# Altium PCB Midi Stick.PcbDoc
Units mm, origin at the board's own origin, x right, y up, seen from the top; angles counter-clockwise.
Board outline 47.13 x 17.53 mm, 2 copper layers (Top Layer, Bottom Layer); 34 components, 23 nets, 118 pads, 51 vias.
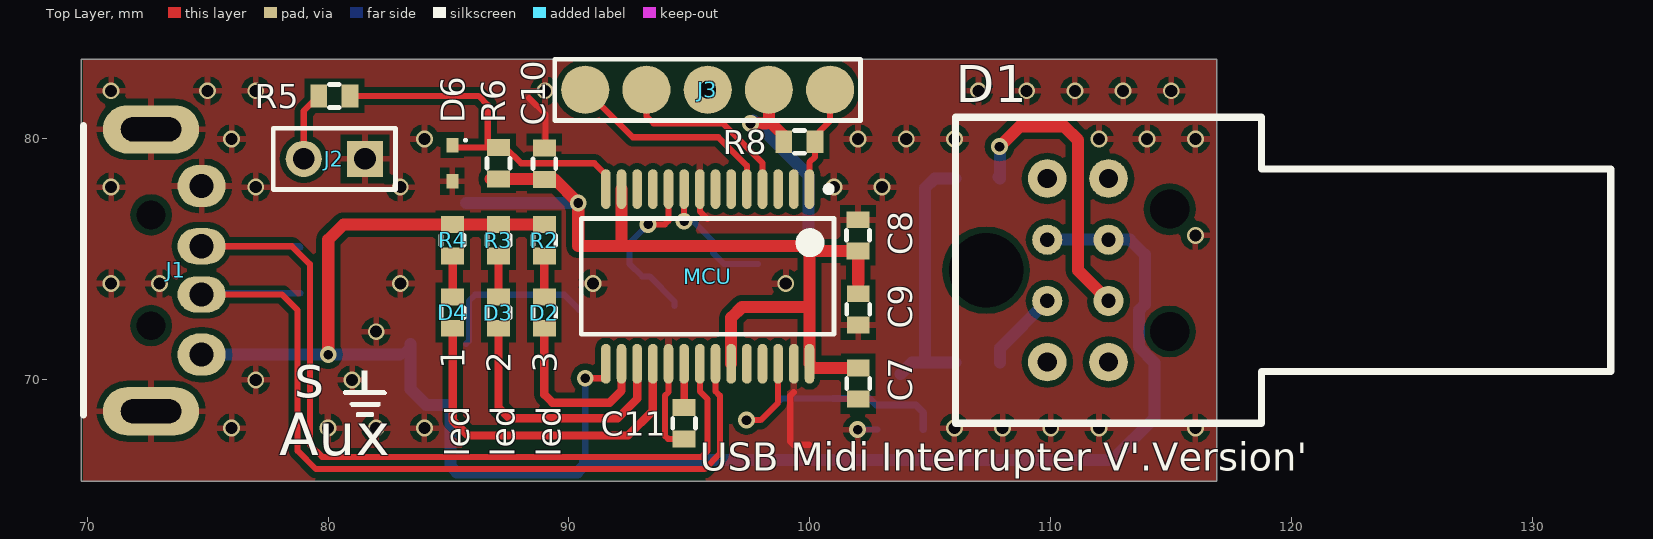
[diagram p0: Top Layer view]
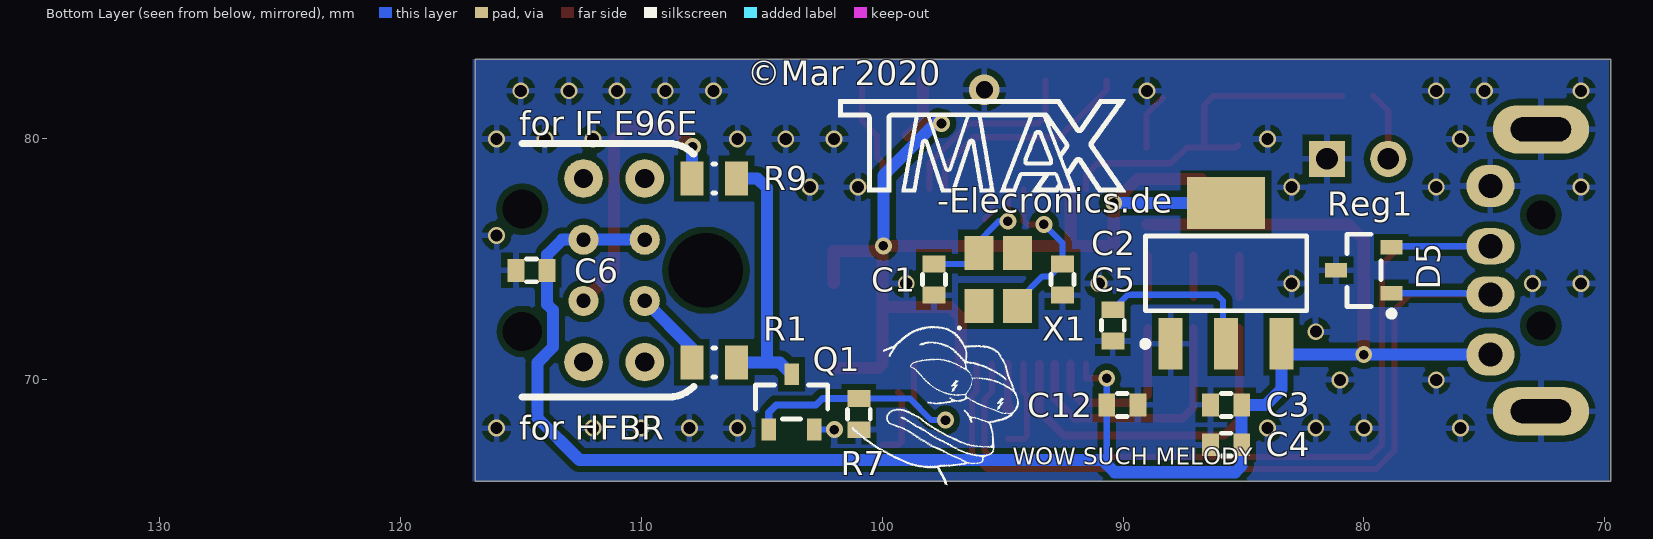
[diagram p1: Bottom Layer view, seen from below]
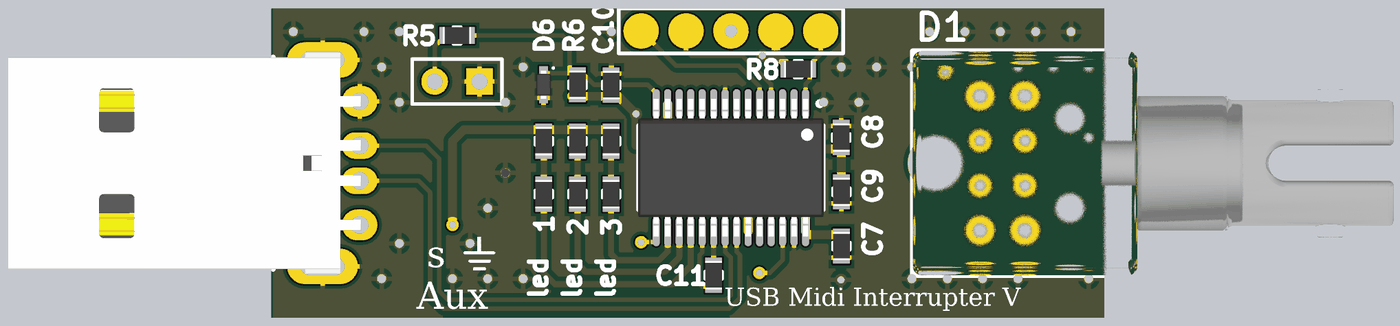
[diagram p2: 3D render of the assembled board from above, using the file's embedded part models]
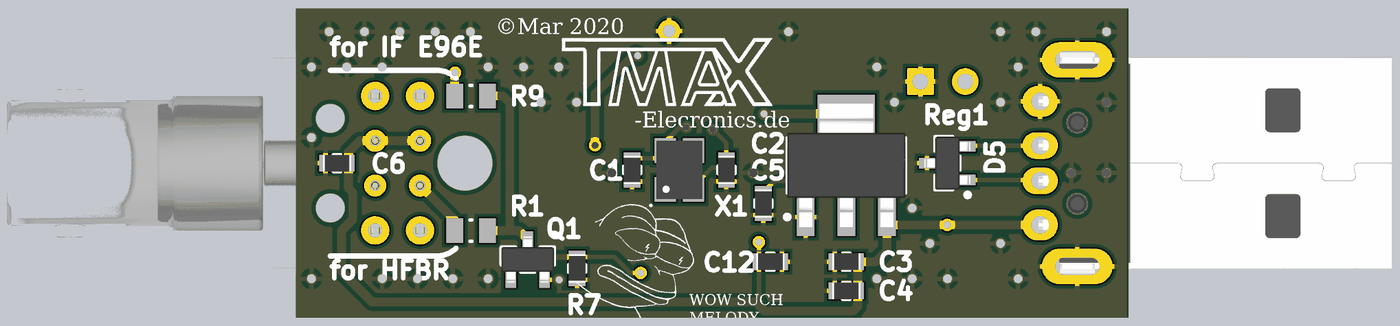
[diagram p3: 3D render of the assembled board from below, using the file's embedded part models]

## Layer stack, top to bottom
Top Solder: solder mask 0.0102, Solder Resist, Dk 3.5
Top Layer: signal copper 0.0356
Dielectric 1: dielectric 0.32, FR-4, Dk 4.8
Bottom Layer: signal copper 0.0356
Bottom Solder: solder mask 0.0102, Solder Resist, Dk 3.5

## Board outline
69.755,65.786 69.755,83.312 116.882,83.312 116.882,65.786

## Design rules (kind name [scope] priority, off if disabled: settings)
Clearance [All] p1: gap=0.127 ignorepadtopadclearanceinfootprint=FALSE except(0: Arc-Text Arc-Hole Track-Text Track-Hole SMDPad-Text SMDPad-Hole THPad-Text THPad-Hole Via-Text Via-Hole Fill-Text Fill-Hole Poly-Text Poly-Hole Region-Text Region-Hole Text-Text Text-Hole; 0.254: Arc-Fill Arc-Poly Arc-Region Track-Fill Track-Poly Track-Region SMDPad-Fill SMDPad-Poly SMDPad-Region THPad-Fill THPad-Poly THPad-Region Via-Fill Via-Poly Via-Region)
PolygonConnect [All] p1: connectstyle=Relief reliefconductorwidth=0.254 reliefentries=4 polygonreliefangle="90 Angle" airgapwidth=0.254
RoutingVias [All] p1: holewidth=0.711 width=1.27 viastyle="Through Hole" minholewidth=0.711 minwidth=1.27 maxholewidth=0.711 maxwidth=1.27
SolderMaskExpansion [All] p1: expansion=0.102
Width [All] p1: maxlimit=5 minlimit=0.152 preferedwidth=0.3 minimp=50.000000 maximp=50.000000 favimp=50.000000
30 further rules are at their usual default settings.

## Components (designator, comment, footprint, x,y, rotation, side; value= is the part's Value field where it differs from the comment)
C1 "22pF" 0603 97.846,74.168 r90 bottom
C2 "22pF" 0603 92.512,74.168 r90 bottom
C3 "4.7uF" 0603 85.725,68.961 r180 bottom
C4 "100nF" 0603 85.725,67.31 r180 bottom
C5 "10uF" 0603 90.424,72.263 r90 bottom
C6 "100nF" 0603 114.554,74.549 r180 bottom
C7 "100nF" 0603 102.009,69.85 r90 top
C8 "1uF" 0603 102,76 r270 top
C9 "100nF" 0603 102.009,72.925 r90 top
C10 "1uF" 0603 88.981,78.973 r270 top
C11 "10uF" 0603 94.783,68.199 r90 top
C12 "100nF" 0603 90.028,68.961 r0 bottom
D1 "HFBR-141X" HFBR-1414MZ 112.395,74.549 r90 top
D2 "3" 0603 88.981,72.795 r270 top
D3 "2" 0603 87.076,72.795 r270 top
D4 "1" 0603 85.171,72.795 r270 top
D5 "TVS" "sot 23" 80.01,74.549 r0 bottom
D6 "TVS Diode" SOD523 85.158,78.994 r270 top
J1 "USB 2.0 Type A Plug" "USB 2.0 TYPE A PLUG" 69.755,74.549 r270 top
J2 "Aux" HDR1X2 81.534,79.176 r180 top
J3 "ICSP" HDR1X5 100.838,82.042 r180 top
MCU "PIC32MX270F256B" TSSOP28_Wide 95.758,74.295 r270 top
Q1 "Mosfet N" "sot 23" 103.759,69.088 r90 bottom
R1 "47Ohm" 0805 106.97,70.724 r0 bottom
R2 "1k" 0603 88.981,75.795 r90 top
R3 "1k" 0603 87.076,75.795 r90 top
R4 "1k" 0603 85.171,75.795 r90 top
R5 "470ohm" 0603 80.264,81.788 r0 top
R6 "10k" 0603 87.076,78.994 r270 top
R7 "1k" 0603 100.965,68.58 r90 bottom
R8 "10k" 0603 99.568,79.883 r0 top
R9 "150Ohm" 0805 106.97,78.359 r0 bottom
Reg1 "3.3V" SOT223 85.725,74.422 r90 bottom
X1 "16MHz" "ECS-3225MV Oscillator" 95.179,74.168 r90 bottom

## Footprints (in the part's own frame and the unit in brackets; to place one, negate y for a bottom-side part, rotate by r counter-clockwise, add the part's x,y. Pads: shape width x height; smd on the part's side, far side on the other; paste and mask are expansions set on the pad)
0603 [mm] "Chip Resistor, 2-Leads, Body 1.55x0.85mm, IPC Medium Density"
  rect 0.7x0.95 smd: 1(-0.65,0) 2(0.65,0)
  silkscreen extent -0.2,-0.48 0.2,0.48, body extent -0.8,-0.48 0.8,0.48, height 0.55
0805 [mm] "Chip Resistor, 2-Leads, Body 2.00x1.25mm, IPC Medium Density"
  rect 0.95x1.4 smd: 1(-0.925,0) 2(0.925,0)
  silkscreen extent -0.05,-0.6 0.05,0.6, body extent -1.05,-0.7 1.05,0.7, height 0.55
"ECS-3225MV Oscillator" [mm] "SON, 4-Leads, Body 2,50x3,20mm, Pitch 1,60mm, Thermal Pad 0,00x0,00mm, IPC Low Density"
  rect 1.4x1.2 smd: 1(-1.1,0.8) 2(-1.1,-0.8) 3(1.1,-0.8) 4(1.1,0.8)
  silkscreen extent -2.06,1.56 -1.96,1.66, body extent -1.65,-1.3 1.65,1.3, height 1.2
HDR1X2 [mm] "Connector; Header; 2 Position"
  rect 1.5x1.5 hole 0.9: 1(0,0)
  round 1.5 hole 0.9: 2(2.54,0)
  silkscreen extent -1.27,-1.27 3.81,1.27
HDR1X5 [mm] "Connector; Header; 5 Position"
  round 2 smd paste-10: 1(0,0) 2(2.54,0) 3(5.08,0) 4(7.62,0) 5(10.16,0)
  silkscreen extent -1.27,-1.27 11.43,1.27
HFBR-1414MZ [mm]
  round 1.25 hole 0.6: A(1.27,2.54) A(1.27,0) CE(-1.27,0) CH(-1.27,2.54)
  round 1.6 hole 0.8: ""(-3.81,0) ""(-3.81,2.54) ""(3.81,0) ""(3.81,2.54)
  round 0 hole 1.63 paste-10: ""(-2.54,-2.54) ""(2.54,-2.54)
  round 1.524 hole 3.1 paste-10: ""(0,5.08)
  silkscreen extent -6.35,-20.85 6.35,6.35, body extent -6.35,-20.85 6.35,6.35, height 10.2
SOD523 [mm] "SODFL, 2-Leads, Body 0.80x1.60mm, IPC Medium Density"
  rect 0.6x0.5 smd: 1(-0.75,0) 2(0.75,0)
  silkscreen extent -1,0.5 -0.9,0.6, body extent -0.8,-0.43 0.8,0.43, height 0.7
SOT223 [mm] "SOT223, 4-Leads, Body 6.50x7.00mm (avg), Pitch 2.30mm, IPC Medium Density"
  rect 2.15x1 smd: 1(-2.925,2.3) 2(-2.925,0) 3(-2.925,-2.3)
  rect 2.15x3.25 smd: 2(2.925,0)
  silkscreen extent -3.05,-3.35 1.55,3.48, body extent -3.5,-3.35 3.5,3.35, height 1.8
"sot 23" [mm] "SOT23, 3-Leads, Body 2.90x2.30mm, Pitch 0.95mm, IPC Medium Density"
  rect 0.9x0.6 smd: 1(-1.15,0.95) 2(-1.15,-0.95) 3(1.15,0)
  silkscreen extent -1.27,-1.5 0.7,1.92, body extent -1.3,-1.5 1.3,1.5, height 1.1
TSSOP28_Wide [mm] "TSSOP, 28-Leads, Body 10.20x5.30mm, Pitch 0.65mm, Microchip"
  oval 1.65x0.4 smd: 1(-3.625,4.225) 2(-3.625,3.575) 3(-3.625,2.925) 4(-3.625,2.275) 5(-3.625,1.625) 6(-3.625,0.975) 7(-3.625,0.325) 8(-3.625,-0.325) 9(-3.625,-0.975) 10(-3.625,-1.625) 11(-3.625,-2.275) 12(-3.625,-2.925) 13(-3.625,-3.575) 14(-3.625,-4.225) 15(3.625,-4.225) 16(3.625,-3.575) 17(3.625,-2.925) 18(3.625,-2.275) 19(3.625,-1.625) 20(3.625,-0.975) 21(3.625,-0.325) 22(3.625,0.325) 23(3.625,0.975) 24(3.625,1.625) 25(3.625,2.275) 26(3.625,2.925) 27(3.625,3.575) 28(3.625,4.225)
  silkscreen extent -3.75,-5.25 2.4,5.25, body extent -3.9,-5.25 3.9,5.25, height 2
"USB 2.0 TYPE A PLUG" [mm]
  oval 1.75x2 hole 1: 1(3.5,5) 4(-3.5,5)
  oval 1.5x2 hole 1: 2(1,5) 3(-1,5)
  round 0 hole 1.2: 3(-2.3,2.9) 4(2.3,2.9)
  oval 2x4 hole 1 slot 2.5 at 90 deg: 5(-5.85,2.9) 5(5.85,2.9)
  silkscreen extent -6,0.1 6,0.1, body extent -6.3,-14.9 6.3,5.1, height 3.4

## Part data
C1 C2 C3 C4 C5 C6 C7 C8 C9 C10 C11 C12: library part Cap, Supplier Part Number 1=1276-2044-1-ND, Supplier Part Number 10=1276-CL10B104KB8NNNLCT-ND, Supplier Part Number 11=399-1085-1-ND, Supplier Part Number 12=1276-1021-1-ND, Supplier Part Number 13=587-2985-1-ND, Supplier Part Number 14=490-14603-1-ND, Supplier Part Number 15=311-3700-1-ND, Supplier Part Number 16=311-1042-1-ND, Supplier Part Number 17=311-1415-1-ND, Supplier Part Number 18=1276-1907-1-ND, Supplier Part Number 19=587-4321-1-ND, Supplier 1=Digi-Key, Supplier 2=Digi-Key, Supplier 3=Digi-Key, Supplier 4=Digi-Key, Supplier 5=Digi-Key, Supplier 6=Digi-Key, Supplier 7=Digi-Key, Supplier 8=Digi-Key, Supplier 9=Digi-Key, Supplier 10=Digi-Key, Supplier 11=Digi-Key, Supplier 12=Digi-Key, Supplier 13=Digi-Key, Supplier 14=Digi-Key, Supplier 15=Digi-Key, Supplier 16=Digi-Key, Supplier 17=Digi-Key, Supplier 18=Digi-Key, Supplier 19=Digi-Key, Supplier 20=Digi-Key, Supplier 21=Digi-Key, Supplier 22=Digi-Key, Supplier Part Number 2=1276-1018-1-ND, Supplier Part Number 3=1276-1182-1-ND, Supplier Part Number 4=1276-1009-1-ND, Supplier Part Number 5=1276-1098-1-ND, Supplier Part Number 6=1276-1119-1-ND, Supplier Part Number 7=490-12737-1-ND, Supplier Part Number 8=1276-1183-1-ND, Supplier Part Number 9=587-1249-1-ND, Supplier Part Number 20=1276-6767-1-ND, Supplier Part Number 21=1276-7060-1-ND, Supplier Part Number 22=311-1084-1-ND
D1: "Fiber optic transmitter. ST connector", Supplier Part Number 1=516-2038-ND, Supplier 1=Digi-Key
D2 D3 D4: library part LED, Supplier Part Number 1=732-4979-1-ND, Supplier 1=Digi-Key, Supplier 2=Digi-Key, Supplier 3=Digi-Key, Supplier 4=Digi-Key, Supplier Part Number 2=732-4971-1-ND, Supplier Part Number 3=732-4966-1-ND, Supplier Part Number 4=732-4981-1-ND
D5: library part "dual TVS Diode", Supplier Part Number 1=1727-3936-1-ND, Supplier 1=Digi-Key
D6: Supplier Part Number 1=UCLAMP3301HCT-ND, Supplier 1=Digi-Key
J1: Supplier Part Number 1=102-3996-ND, Supplier 1=Digi-Key
J2: library part "Header 2", "Header, 2-Pin", LatestRevisionDate=17-Jul-2002, LatestRevisionNote="Re-released for DXP Platform.", Publisher="Altium Limited"
J3: library part "Header 5", "Header, 5-Pin", LatestRevisionDate=17-Jul-2002, LatestRevisionNote="Re-released for DXP Platform.", Publisher="Altium Limited"
MCU: library part PIC32MX2xxFxxxB, "32Bit pic with usb", Supplier Part Number 1=PIC32MX270F256B-I/SS-ND, Supplier 1=Digi-Key
Q1: Supplier Part Number 1=1727-5305-1-ND, Supplier 1=Digi-Key, Supplier 2=Digi-Key, Supplier 3=Digi-Key, Supplier 4=Digi-Key, Supplier 5=Digi-Key, Supplier Part Number 2=1727-1123-1-ND, Supplier Part Number 3=BSC0906NSATMA1CT-ND, Supplier Part Number 4=T2N7002AKLMCT-ND, Supplier Part Number 5=1727-4714-1-ND
R1 R2 R3 R4 R5 R6 R7 R8 R9: library part Resistor, Supplier Part Number 1=RHM10DCT-ND, Supplier Part Number 10=311-200JRCT-ND, Supplier Part Number 11=311-300JRCT-ND, Supplier Part Number 12=YAG3356CT-ND, Supplier Part Number 13=311-220GRCT-ND, Supplier Part Number 14=311-220KGRCT-ND, Supplier Part Number 15=311-1.0KGRCT-ND, Supplier Part Number 16=311-200KHRCT-ND, Supplier Part Number 17=A102451-ND, Supplier Part Number 18=311-2.00KHRCT-ND, Supplier Part Number 19=311-10KGRCT-ND, Supplier 1=Digi-Key, Supplier 2=Digi-Key, Supplier 3=Digi-Key, Supplier 4=Digi-Key, Supplier 5=Digi-Key, Supplier 6=Digi-Key, Supplier 7=Digi-Key, Supplier 8=Digi-Key, Supplier 9=Digi-Key, Supplier 10=Digi-Key, Supplier 11=Digi-Key, Supplier 12=Digi-Key, Supplier 13=Digi-Key, Supplier 14=Digi-Key, Supplier 15=Digi-Key, Supplier 16=Digi-Key, Supplier 17=Digi-Key, Supplier 18=Digi-Key, Supplier 19=Digi-Key, Supplier 20=Digi-Key, Supplier 21=Digi-Key, Supplier 22=Digi-Key, Supplier 23=Digi-Key, Supplier 24=Digi-Key, Supplier 25=Digi-Key, Supplier 26=Digi-Key, Supplier 27=Digi-Key, Supplier 28=Digi-Key, Supplier 29=Digi-Key, Supplier 30=Digi-Key, Supplier 31=Digi-Key, Supplier 32=Digi-Key, Supplier 33=Digi-Key, Supplier 34=Digi-Key, Supplier 35=Digi-Key, Supplier 36=Digi-Key, Supplier 37=Digi-Key, Supplier 38=Digi-Key, Supplier 39=Digi-Key, Supplier 40=Digi-Key, Supplier 41=Digi-Key, Supplier 42=Arrow, Supplier Part Number 2=696-1834-1-ND, Supplier Part Number 3=RMCF0603JT3K90CT-ND, Supplier Part Number 4=RHM1.0KDCT-ND, Supplier Part Number 5=RHM100DCT-ND, Supplier Part Number 6=RMCF0603FT54K9CT-ND, Supplier Part Number 7=RMCF0603FT40K2CT-ND, Supplier Part Number 8=P200LCT-ND, Supplier Part Number 9=311-1.0KJRCT-ND, Supplier Part Number 20=311-1.00LRCT-ND, Supplier Part Number 21=311-220JRCT-ND, Supplier Part Number 22=311-2.2KJRCT-ND, Supplier Part Number 23=311-4.7KJRCT-ND, Supplier Part Number 24=311-10.0KLRCT-ND, Supplier Part Number 25=311-12KJRCT-ND, Supplier Part Number 26=YAG3226CT-ND, Supplier Part Number 27=311-75KJRCT-ND, Supplier Part Number 28=311-200KJRCT-ND, Supplier Part Number 29=311-499KLRCT-ND, Supplier Part Number 30=YAG6087CT-ND, Supplier Part Number 31=696-1677-1-ND, Supplier Part Number 32=541-3127-6-ND, Supplier Part Number 33=311-47.0HRCT-ND, Supplier Part Number 34=311-470HRCT-ND, Supplier Part Number 35=311-470KGRCT-ND, Supplier Part Number 36=311-100KGRCT-ND, Supplier Part Number 37=311-5.23KHRCT-ND, Supplier Part Number 38=311-52.3KHRCT-ND, Supplier Part Number 39=311-22KGRCT-ND, Supplier Part Number 40=311-15.8KHRCT-ND, Supplier Part Number 41=311-7.15KHRCT-ND, Supplier Part Number 42=RC0603FR-072K2L
Reg1: library part VReg
X1: library part "Quarz crystal", Supplier Part Number 1=SER4069TR-ND, Supplier 1=Digi-Key

## Via types
v1: diameter 0.7, hole 0.5, Top Layer to Bottom Layer, tented both sides, 40 vias
v2: diameter 0.7, hole 0.4, Top Layer to Bottom Layer, 5 vias
v3: diameter 0.7, hole 0.4, Top Layer to Bottom Layer, tented both sides, 5 vias
v4: diameter 1.27, hole 0.711, Top Layer to Bottom Layer, 1 vias

## Nets (pads, with @x,y where several pads share a name; then routed paths per layer and width w, separated by ;. In a path a pad name is that pad's centre, name@x,y a point inside that pad or via, vN(x,y) a via of type N, cw(c..) or ccw(c..) an arc to the next point about the centre after c; other vN are vias at no path point)
+3.3V: C5.2 C7.2 C8.2 C9.2 C10.2 J3.2 MCU.13 MCU.23 MCU.28 R6.2 R8.1 Reg1.2 | length 54.6
  Top Layer w0.5: R6.2@86.741,78.344 89.385,78.344 v3(90.386,77.343) 90.386,75.565 92.202,75.565 ; MCU.13 92.183,75.584 92.202,75.565 ; MCU.23 96.733,72.579 97.181,73.027 99.983,73.027 ; v3(97.536,80.645) 98.171,80.645 98.298,80.772 J3.2@98.298,82.423 ; 98.354,80.701 R8.1@98.918,80.137 ; C7.2 100.153,70.5 MCU.28 99.983,73.027 ; 102.009,74.018 102.009,75.341 C8.2 100.164,75.35 v2@99.983,75.531 ; 92.202,75.565 v2(99.949,75.565) v2@99.983,75.531 ; 99.983,73.027 v2@99.983,75.531
  Bottom Layer w0.254: Reg1.2@85.725,71.497 85.852,71.624 85.852,73.279 86.106,73.533 89.804,73.533 C5.2
  Bottom Layer w0.5: Reg1.2@85.725,77.347 90.382,77.347 v3(90.386,77.343) ; v3(97.536,80.645) 97.663,80.772 99.949,78.486 v2(99.949,75.565)
+5V: C3.2 C4.2 C6.2 C12.2 D1.A J1.1 MCU.15 R2.2 R3.2 R4.2 Reg1.3 | length 76
  Top Layer w0.254: v2@90.645,70.104 v2(90.678,70.071) 91.533,70.071 MCU.15
  Top Layer w0.5: v2(80.01,71.049) 80.01,75.819 80.636,76.445 R4.2 R3.2 R2.2
  Bottom Layer w0.254: Reg1.3@82.977,71.049 Reg1.3 ; 90.678,66.675 v2(90.678,70.071)
  Bottom Layer w0.5: J1.1 v2(80.01,71.049) Reg1.3@82.977,71.049 ; Reg1.3 83.425,69.61 84.074,68.961 C3.2 C4.2 85.075,66.436 85.344,66.167 90.352,66.167 90.678,66.493 90.678,66.675 112.563,66.675 114.3,68.412 114.3,70.724 113.665,71.359 113.665,72.898 113.904,73.137 C6.2 113.904,75.199 113.284,75.819 112.395,75.819 109.855,75.819 D1.A@109.728,75.819
GND: C1.1 C2.1 C3.1 C4.1 C5.1 C6.1 C7.1 C8.1 C9.1 C10.1 C11.1 C12.1 D5.3 D6.2 J1.4@74.755,78.049 J1.5 J2.1 J3.3 MCU.8 MCU.19 MCU.27 Q1.2 R7.1 Reg1.1 | length 11.4
  Top Layer w0.254: 88.35,81.7 89.027,81.023 C10.1@89.027,79.623 ; MCU.19 94.133,69.495 93.98,69.342 93.98,67.691 94.122,67.549 C11.1 ; MCU.8 95.433,77 95.758,76.675 ; 99.333,69.488 99.187,69.342 99.187,67.437 99.314,67.31 99.968,67.31 99.983,67.295
  Bottom Layer w0.254: v3(101.981,67.935) 101.984,67.938 Q1.2
  other v1: 76,68 80,68 82,68 84,68 106,68 108,68 110,68 112,68 116,68 77,70 81,70 82,72 71,74 73,74 83,74 91,74 99,74 116,76 71,78 77,78 83,78 101,78 103,78 76,80 84,80 102,80 104,80 106,80 112,80 114,80 116,80 71,82 75,82 77,82 89,82 107,82 109,82 111,82 113,82 115,82
  other v4: 95.758,82.042
NetC1_2: C1.2 MCU.9 X1.4 | length 5.9
  Top Layer w0.254: v3(94.783,76.587) 94.99,76.587 94.783,76.794 MCU.9
  Bottom Layer w0.254: v3(94.783,76.587) 95.156,76.587 96.227,75.516 X1.4 96.429,74.818 C1.2
NetC2_2: C2.2 MCU.10 X1.2 | length 6.9
  Top Layer w0.254: v3(93.289,76.454) 93.98,76.454 94.133,76.607 MCU.10
  Bottom Layer w0.254: v3(93.289,76.454) 92.512,75.677 C2.2 93.035,74.295 93.345,74.295 94.379,73.261 X1.2
NetC11_2: C11.2 MCU.20 | length 1.8
  Top Layer w0.3: C11.2 MCU.20
NetD1_CE: D1.CE R9.2 | length 12.7
  Top Layer w0.5: v2(107.873,79.683) 108.708,80.518 110.565,80.518 111.127,79.956 111.127,74.547 D1.CE@112.268,73.406 ; D1.CE D1.CE@112.268,73.406 ; D1.CE@112.522,73.406 D1.CE@112.268,73.406
  Bottom Layer w0.5: R9.2@107.823,78.431 R9.2 107.895,79.661 v2(107.873,79.683)
NetD1_CH: D1.CH R1.2 | length 3.4
  Bottom Layer w0.5: R1.2 107.895,71.319 D1.CH
NetD2_1: D2.1 R2.1 | length 1.7
  Top Layer w0.35: D2.1 R2.1
NetD2_2: D2.2 MCU.16 | length 7.4
  Top Layer w0.35: D2.2 88.981,69.388 89.31,69.059 91.694,69.059 92.183,69.548 MCU.16
NetD3_1: D3.1 R3.1 | length 1.7
  Top Layer w0.35: D3.1 R3.1
NetD3_2: D3.2 MCU.17 | length 11
  Top Layer w0.35: D3.2 87.076,68.849 87.525,68.4 92.022,68.4 92.833,69.211 MCU.17
NetD4_1: D4.1 R4.1 | length 1.7
  Top Layer w0.35: D4.1 R4.1
NetD4_2: D4.2 MCU.18 | length 14.8
  Top Layer w0.35: D4.2 85.171,68.326 85.806,67.691 92.456,67.691 93.483,68.718 MCU.18
NetD5_1: D5.1 J1.2 MCU.22 | length 36.1
  Top Layer w0.254: J1.2 78.089,73.549 78.74,72.898 78.74,67.056 79.502,66.294 95.631,66.294 96.266,66.929 96.266,69.342 96.083,69.525 MCU.22
  Bottom Layer w0.254: J1.2 74.805,73.599 D5.1
NetD5_2: D5.2 J1.3@74.755,75.549 MCU.21 | length 37
  Top Layer w0.254: J1.3@74.755,75.549 78.502,75.549 79.248,74.803 79.248,67.31 79.756,66.802 95.504,66.802 95.758,67.056 95.758,69.196 95.433,69.521 MCU.21
  Bottom Layer w0.254: J1.3@74.755,75.549 78.81,75.549 D5.2
NetD6_1: D6.1 MCU.14 R5.2 R6.1 | length 15.1
  Top Layer w0.254: R5.2 86.248,81.788 86.629,81.407 86.629,79.756 R6.1@86.741,79.644 ; D6.1@85.217,79.744 85.317,79.644 R6.1@86.741,79.644 ; MCU.14 91.533,78.52 91.059,78.994 88.011,78.994 87.361,79.644 R6.1@86.741,79.644
NetJ2_2: J2.2 R5.1 | length 2.9
  Top Layer w0.254: J2.2 78.994,81.168 R5.1
NetJ3_1: J3.1 MCU.1 R8.2 | length 4.9
  Top Layer w0.254: MCU.1 99.983,79.028 100.218,79.263 100.218,80.137 100.838,80.757 J3.1@100.838,82.423
NetJ3_4: J3.4 MCU.4 | length 8.2
  Top Layer w0.254: J3.4@93.218,82.423 J3.4 93.218,80.94 93.513,80.645 96.393,80.645 98.033,79.005 MCU.4
NetJ3_5: J3.5 MCU.5 | length 9.4
  Top Layer w0.254: J3.5@90.678,82.423 J3.5 92.648,80.072 96.204,80.072 97.383,78.893 MCU.5
NetMCU_26: MCU.26 Q1.1 R7.2 | length 11.9
  Top Layer w0.254: v2(97.367,68.328) 97.953,68.328 98.683,69.059 MCU.26
  Bottom Layer w0.254: v2(97.367,68.328) 97.953,68.328 98.854,69.23 R7.2
  Bottom Layer w0.3: R7.2 102.474,69.23 102.743,68.961 104.394,68.961 104.709,68.646 Q1.1
NetQ1_D: Q1.3 R1.1 R9.1 | length 11.2
  Bottom Layer w0.5: Q1.3 104.245,70.724 104.775,70.724 ; R1.1 104.775,70.724 ; R9.1 105.177,78.359 104.775,77.957 104.775,70.724
pads on no net: D1. J1.3@72.655,76.849 J1.4@72.655,72.249 MCU.2 MCU.3 MCU.6 MCU.7 MCU.11 MCU.12 MCU.24 MCU.25 X1.1 X1.3

## Polygon pours and split planes (outlines as drawn)
GND on Top Layer "Top Layer-GND" (solid, pour order 0): 69.85,83.312 116.882,83.312 116.882,65.786 69.85,65.786
GND on Bottom Layer "Bottom Layer-GND" (solid, pour order 2): 69.85,83.312 116.988,83.312 116.988,65.786 69.85,65.786

## Silkscreen, mask and mechanical layers (free items; w line width, h text height)
Top Overlay:
  region: 81.622,70.341 81.622,70.306 81.622,70.27 81.622,70.235 81.622,70.2 81.622,70.164 81.622,70.129 81.622,70.094 81.622,70.059 81.622,70.023 81.622,69.988 81.622,69.953 81.622,69.917 81.622,69.882 81.622,69.847 81.622,69.812 81.622,69.776 81.622,69.741 81.622,69.706 81.622,69.67 81.622,69.635 81.622,69.6 81.622,69.565 82.363,69.565 82.363,69.529 82.399,69.529 82.399,69.494 82.434,69.494 82.434,69.459 82.434,69.423 82.399,69.423 82.399,69.388 80.669,69.388 80.669,69.423 80.634,69.423 80.634,69.459 80.634,69.494 80.634,69.529 80.669,69.529 80.669,69.565 81.41,69.565 81.41,69.6 81.41,69.635 81.41,69.67 81.41,69.706 81.41,69.741 81.41,69.776 81.41,69.812 81.41,69.847 81.41,69.882 81.41,69.917 81.41,69.953 81.41,69.988 81.41,70.023 81.41,70.059 81.41,70.094 81.41,70.129 81.41,70.164 81.41,70.2 81.41,70.235 81.41,70.27 81.41,70.306 81.41,70.341 81.41,70.376 81.622,70.376
  region: 82.169,69.035 82.169,69 82.169,68.965 82.169,68.929 82.134,68.929 82.134,68.894 80.969,68.894 80.969,68.929 80.934,68.929 80.934,68.965 80.899,68.965 80.899,69 80.899,69.035 80.934,69.035 80.934,69.071 82.169,69.071
  region: 81.869,68.612 81.905,68.612 81.905,68.576 81.905,68.541 81.905,68.506 81.869,68.506 81.869,68.471 81.163,68.471 81.163,68.506 81.163,68.541 81.163,68.576 81.163,68.612 81.199,68.612 81.199,68.647 81.869,68.647
  text "s" at 78.594,68.707 h3
  text "led" at 85.852,66.802 h1 r90
  text "led" at 87.757,66.802 h1 r90
  text "led" at 89.662,66.802 h1 r90
  text "USB Midi Interrupter V'.Version'" at 95.428,65.837 h2
Bottom Overlay:
  drawing of 9 lines, arcs and shapes, not listed
  text "©Mar 2020" at 105.591,81.873 h1.75
  text "for IF E96E" at 115.062,80.147 h1
  text "-Elecronics.de" at 97.716,76.581 h1.75
  text "for HFBR" at 115.062,67.506 h1
  text "WOW SUCH MELODY" at 94.573,66.251 h1.2
Mechanical 8:
  the board outline again, w0.3